# Altium PCB PCB1.PcbDoc
Units mil, origin at the board's own origin, x right, y up, seen from the top; angles counter-clockwise.
Board outline 10200 x 4275 mil, 2 copper layers (Top Layer, Bottom Layer); 50 components, 28 nets, 114 pads, 0 vias.
Unrouted connection lines stored in the file: 51.
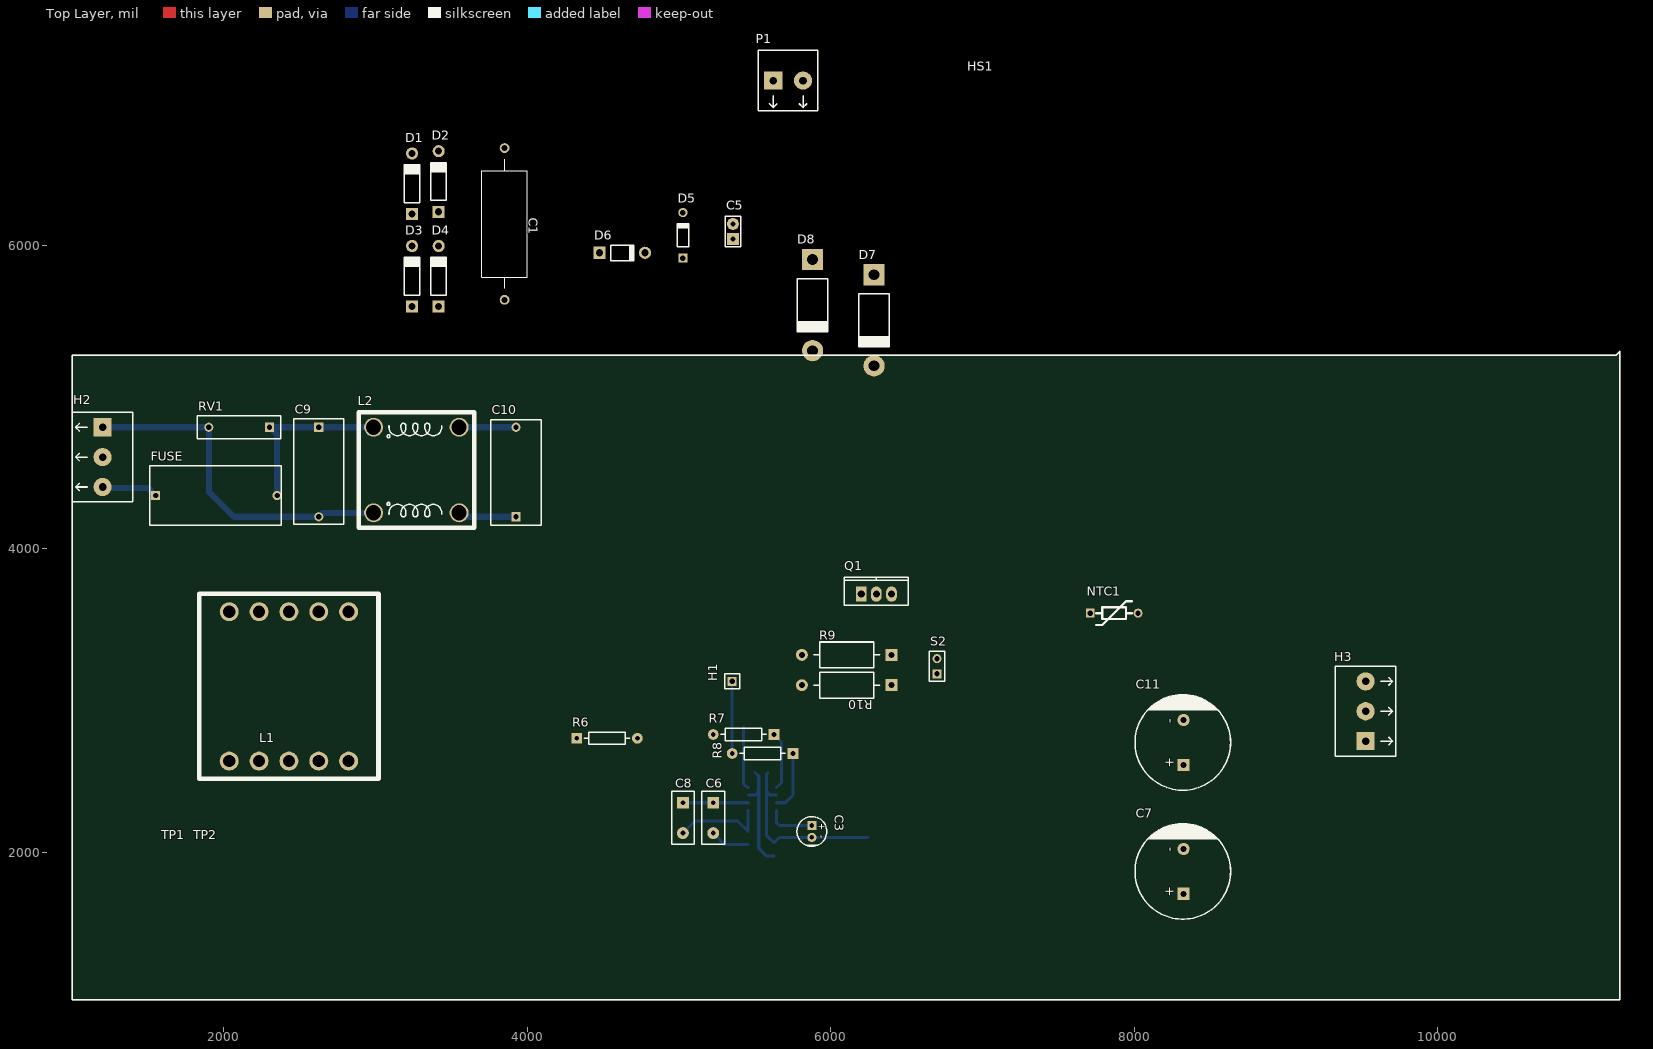
[diagram p0: Top Layer view]
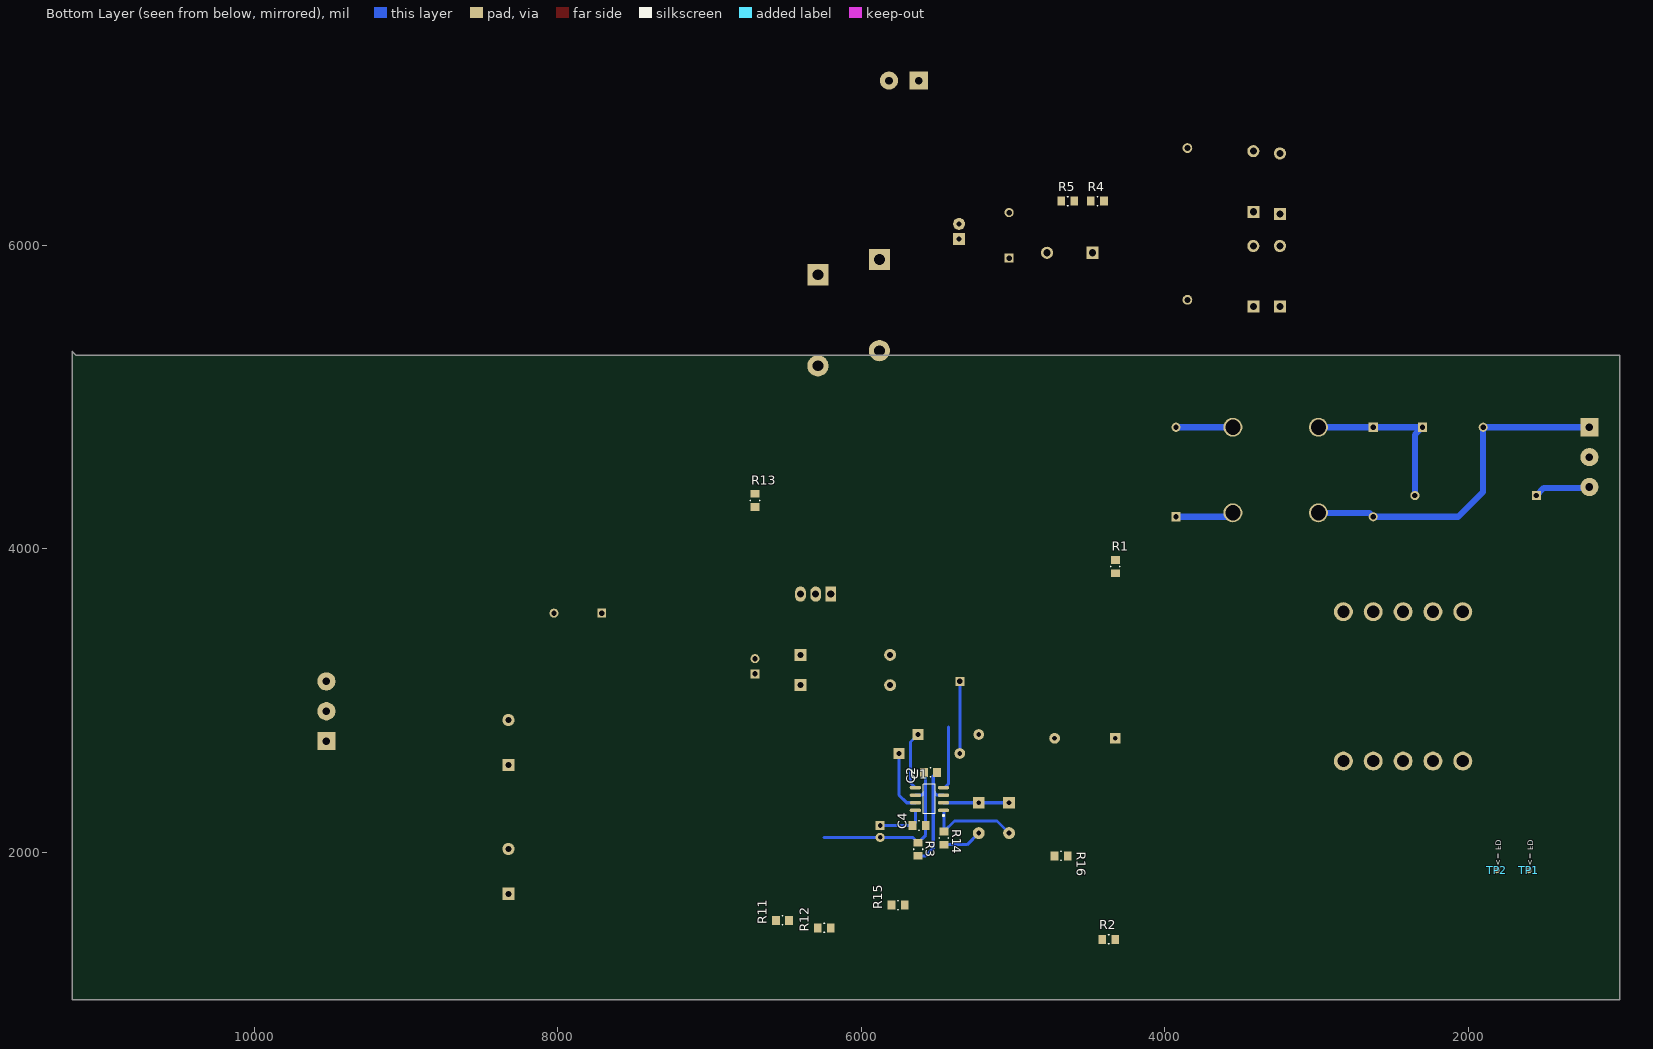
[diagram p1: Bottom Layer view, seen from below]

## Layer stack, top to bottom
Top Solder: solder mask 0.4, Solder Resist, Dk 3.5
Top Layer: signal copper 1.4
Dielectric 1: dielectric 12.6, FR-4, Dk 4.8
Bottom Layer: signal copper 1.4
Bottom Solder: solder mask 0.4, Solder Resist, Dk 3.5

## Board outline
1000,1025 11200,1025 11200,5300 11175,5275 1000,5275

## Design rules (kind name [scope] priority, off if disabled: settings)
Clearance [All] p1: gap=10 ignorepadtopadclearanceinfootprint=FALSE except(0: Arc-Hole Track-Hole SMDPad-Hole THPad-Hole Via-Hole Fill-Hole Poly-Hole Region-Hole Text-Hole)
Height [All] p1: minheight=0 maxheight=1574.8 prefheight=500
PolygonConnect [All] p1: connectstyle=Relief reliefconductorwidth=10 reliefentries=4 polygonreliefangle="90 Angle" airgapwidth=10
RoutingVias [All] p1: holewidth=28 width=50 viastyle="Through Hole" minholewidth=28 minwidth=50 maxholewidth=28 maxwidth=50
SolderMaskExpansion [All] p1: expansion=4
Width [All] p1: maxlimit=40 minlimit=20 preferedwidth=20
29 further rules are at their usual default settings.

## Components (designator, comment, footprint, x,y, rotation, side; value= is the part's Value field where it differs from the comment)
C1 "470n" AXIAL-1.0 3850,6140 r270 top
C2 "10n" 0805C 5500,2525 r0 bottom
C3 "22u" CP-5.0mm-11.0mm-2.0mm 5875,2175 r90 top
C4 "100n" 0805C 5661.61,2175 r180 bottom
C5 "12nF" C100-200-100 5355,6040 r90 top
C6 "680n" C200-350-150 5225,2325 r270 top
C7 "100u" CP-16.0mm-25.0mm-7.5mm 8325,1725 r270 top
C8 "330n" C200-350-150 5025,2325 r270 top
C9 "220nF" C590-695-330 2625,4800 r270 top
C10 "Value" C590-695-330 3925,4210 r90 top
C11 "100u" CP-16.0mm-25.0mm-7.5mm 8325,2575 r270 top
D1 "1N4007" DO-41-Plastic 3240,6205 r90 top
D2 "1N4007" DO-41-Plastic 3415,6220 r90 top
D3 "1N4007" DO-41-Plastic 3240,5595 r90 top
D4 "1N4007" DO-41-Plastic 3415,5595 r90 top
D5 "1N4150" DO-35-Glass 5025,5915 r90 top
D6 "1N4746A" DO-41-Glass 4475,5950 r0 top
D7 "1N5401" DO-201-Plastic 6285,5805 r270 top
D8 "1N5401" DO-201-Plastic 5880,5905 r270 top
FUSE "Value" Fuse 1550,4350 r0 top
H1 "Header_1x1" HDR1X1 5350,3125 r0 top
H2 "AC_in" TB03 1200,4800 r270 top
H3 "DC_out" TB03 9525,2731.3 r90 top
HS1 "HS-TO-220" HS-TO-220-183012 7350,5775 r90 top
L1 "Indutor" TRZ30.010.1 2821.85,2600 r180 top
L2 "Indutor" IndutorAcoplado 2986.02,4800 r0 top
NTC1 "Value" Thermistor-315mil 7710.04,3575 r0 top
P1 "DC_input" KRE_2 5620,7085 r0 top
Q1 "IRF840" TO-220/123 6200,3700 r0 top
R1 "1.5M" 0805R 4325,3925 r270 bottom
R2 "1.5M" 0805R 4325,1425 r0 bottom
R3 "22k" 0805R 5625,2061.61 r270 bottom
R4 "180k" 0805R 4486.61,6290 r180 bottom
R5 "180k" 0805R 4681.61,6290 r180 bottom
R6 "100" R400-2.0mm 4325,2750 r0 top
R7 "68k" R400-2.0mm 5625,2775 r180 top
R8 "10" R400-2.0mm 5750,2650 r180 top
R9 "0.33" R-AC01 6400,3300 r180 top
R10 "0.33" R-AC01 6400,3100 r180 top
R11 "750k" 0805R 6475,1550 r0 bottom
R12 "750k" 0805R 6200,1500 r0 bottom
R13 "9.53k" 0805R 6700,4275 r90 bottom
R14 "12k" 0805R 5455,2135 r270 bottom
R15 "750k" 0805R 5713.39,1650 r0 bottom
R16 "750k" 0805R 4725,1975 r180 bottom
RV1 "Res Varistor" C400-550-150 2300,4800 r180 top
S2 "Header_1x2" HDR-M-1x2-2.54mm-180-9.2mm 6700,3175 r90 top
TP1 "TestPoint" FD 1600,1880 r90 top
TP2 "TestPoint" FD 1810,1880 r90 top
U1 "IC" SO8_L 5550,2350 r0 bottom

## Footprints (in the part's own frame and the unit in brackets; to place one, negate y for a bottom-side part, rotate by r counter-clockwise, add the part's x,y. Pads: shape width x height; smd on the part's side, far side on the other; paste and mask are expansions set on the pad)
0805C [mm] "Chip Capacitor; Body 2 x 1.3 mm (LxW typ)"
  rect 1.3x1.5 smd: 1(0,0) 2(2.2,0)
  silkscreen extent 1.05,-0.76 1.15,0.76, body extent 0.1,-0.64 2.1,0.61, height 0.78
0805R [mm] "Chip Resistor; Body 2 x 1.3 mm (LxW typ)"
  rect 1.3x1.5 smd: 1(0,0) 2(2.2,0)
  silkscreen extent 1.05,-0.76 1.15,0.76, body extent 0.1,-0.64 2.1,0.62, height 0.78
AXIAL-1.0 [mm] "Axial Device, Thru-Hole; 2 Leads; 1.0 in Pin Spacing"
  round 1.65 hole 1: 1(-12.7,0) 2(12.7,0)
  silkscreen extent -10.79,-3.81 10.79,3.81
C100-200-100 [mm] "Radial Cap, Thru-Hole; 2 Leads; 0.1 in Pin Spacing"
  rect 2x2 hole 0.8: 1(0,0)
  round 2 hole 0.8: 2(2.54,0)
  silkscreen extent -1.27,-1.27 3.81,1.27, body extent -1.65,-0.89 4.19,0.81, height 6.22
C200-350-150 [mm] "Radial Cap, Thru-Hole; 2 Leads; 0.2 in Pin Spacing"
  rect 2x2 hole 0.8: 1(0,0)
  round 2 hole 0.8: 2(5.08,0)
  silkscreen extent -1.91,-1.91 6.98,1.91, body extent -1.01,-0.81 5.98,0.89, height 7.31
C400-550-150 [mil] "Radial Cap, Thru-Hole; 2 Leads; 0.4 in Pin Spacing"
  rect 60x60 hole 35: 1(0,0)
  round 60 hole 35: 2(400,0)
  silkscreen extent -75,-75 475,75
C590-695-330 [mil] "Radial Cap, Thru-Hole; 2 Leads; 0.4 in Pin Spacing"
  rect 60x60 hole 35.43: 1(0,0)
  round 60 hole 35.43: 2(590,0)
  silkscreen extent -55,-165 640,165
CP-5.0mm-11.0mm-2.0mm [mil] "Capacitor Electrolytic Radial - 5 x 11 mm - Pin Spacing 2.0 mm"
  rect 60x60 hole 30: 1(0,0)
  round 60 hole 30: 2(-78.74,0)
  silkscreen extent -138,-98 59,98, body extent -139,-101 59,98, height 454
CP-16.0mm-25.0mm-7.5mm [mil] "Capacitor Electrolytic Radial - 16 x 25 mm - Pin Spacing 7.5 mm"
  rect 80x80 hole 40: 1(0,0)
  round 80 hole 40: 2(-295.28,0)
  silkscreen extent -462,-320 167,310, body extent -472,-325 177,323, height 1028
DO-35-Glass [mil] "Diode, Axial; Body 3.8 x 1.9 mm (LxDia. max), Lead Dia. 0.53 mm (max), Lead Spacing 7.62 mm; 3D Wagner Bernardo"
  rect 60x60 hole 35.43: A(0,0)
  round 60 hole 35.43: K(300,0)
  silkscreen extent 75,-37 225,37, body extent -10,-38 310,38, height 77
DO-41-Glass [mil] "Diode, Axial; Body 4.1 x 2.6 mm (LxDia. max), Lead Dia. 0.86 mm (max), Lead Spacing 7.62 mm; 3D Julien THIEREN"
  rect 80x80 hole 47.24: A(0,0)
  round 80 hole 47.24: K(300,0)
  silkscreen extent 75,-51 225,51, body extent -14,-53 316,52, height 111
DO-41-Plastic [mil] "Diode, Axial; Body 4.1 x 2.6 mm (LxDia. max), Lead Dia. 1.14 mm (max), Lead Spacing 10.16 mm; 3D Wagner Bernardo"
  rect 80x80 hole 47.24: A(0,0)
  round 80 hole 47.24: K(400,0)
  silkscreen extent 75,-52 325,51, body extent -15,-55 419,51, height 112
DO-201-Plastic [mil] "Diode, Axial; Body 9.5 x 5.3 mm (LxDia. max), Lead Dia. 1.30 mm (max), Lead Spacing 15.24 mm; 3D Wagner Bernardo"
  rect 140x140 hole 70.87: A(0,0)
  round 140 hole 70.87: K(600,0)
  silkscreen extent 125,-100 475,100, body extent -25,-110 627,110, height 239
FD [mm]
  round 1 smd far side: 10(0,0)
Fuse [mil] "Radial Cap, Thru-Hole; 2 Leads; 0.4 in Pin Spacing"
  rect 60x60 hole 35.43: 1(0,0)
  round 60 hole 35.43: 2(800,0)
  silkscreen extent -39,-195 827,195
HDR1X1 [mm] "Connector; Header; 1 Position"
  rect 1.5x1.5 hole 0.9: 1(0,0)
  silkscreen extent -1.27,-1.27 1.27,1.27
HDR-M-1x2-2.54mm-180-9.2mm [mm] "Male Header, 1 line, 2 columns, 180 degrees, 9.2 mm length, 3D ASSMANN WSW components"
  rect 1.5x1.5 hole 0.9: 1(0,0)
  round 1.5 hole 0.9: 2(2.54,0)
  silkscreen extent -1.27,-1.27 3.81,1.27, body extent -1.17,-1.25 3.91,1.25, height 6.23
HS-TO-220-183012 [mil] "Heatsink TO220 183012"
  body extent 0,0 1331,457, height 984
IndutorAcoplado [mm] "Indutor acoplado - filtro EMI"
  round 3.175 hole 2.54: 1(0,0) 2(14.325,0) 3(0,-14.325) 4(14.325,-14.325)
  silkscreen extent -2.5,-16.82 16.82,2.5
KRE_2 [mil] "Terminal Block 2 pins"
  rect 120x120 hole 50: 1(0,0)
  round 120 hole 50: 2(196.85,0)
  silkscreen extent -98,-200 295,200, body extent -123,-190 294,216, height 559
R400-2.0mm [mm] "Axial Device, Thru-Hole; 2 Leads; 0.4 in Pin Spacing"
  rect 1.8x1.8 hole 0.8: 1(0,0)
  round 1.8 hole 0.8: 2(10.16,0)
  silkscreen extent 1.27,-1.02 8.89,1.02, body extent -0.3,-1.17 10.46,1.14, height 2.93
R-AC01 [mm] "Cemented Wirewound Resistor 1 W"
  rect 2x2 hole 1: 1(0,0)
  round 2 hole 1: 2(15,0)
  silkscreen extent 2,-2.15 13,2.15
SO8_L [mm] "SOIC, 8-Leads, Body 4.9x3.9mm, Pitch 1.27mm, IPC High Density"
  oval 1.9x0.6 smd: 1(-2.35,1.905) 2(-2.35,0.635) 3(-2.35,-0.635) 4(-2.35,-1.905) 5(2.35,-1.905) 6(2.35,-0.635) 7(2.35,0.635) 8(2.35,1.905)
  silkscreen extent -2.47,-2.5 1,2.88, body extent -2,-2.5 2,2.5, height 1.75
TB03 [mil] "Terminal Block 3 pins"
  rect 120x120 hole 50: 1(0,0)
  round 120 hole 50: 2(196.85,0) 3(393.7,0)
  silkscreen extent -100,-200 492,200, body extent -123,-190 491,216, height 559
Thermistor-315mil [mm] "Thermistor 315 mil"
  rect 1.5x1.5 hole 0.9: 1(0,0)
  round 1.5 hole 0.9: 2(8,0)
  silkscreen extent 1,-2 7,2
TO-220/123 [mil] "TO, Thru-Hole, Vertical, Heatsink Mounted; 3 In-Line Leads; Pitch 2.54 mm"
  rect 70x100 hole 47.24: 1(0,0)
  oval 70x100 hole 47.24: 2(100,0) 3(200,0)
  silkscreen extent -111,-73 311,112, body extent -121,-59 321,126, height 832
TRZ30.010.1 [mm] "Carretel de Trafo - TERZI"
  round 3.175 hole 2.032: 1(0,0) 2(5,0) 3(10,0) 4(15,0) 5(20,0) 6(0,-25) 7(5,-25) 8(10,-25) 9(15,-25) 10(20,-25)
  silkscreen extent -5,-28 25,3

## Part data
C1: library part Capacitor, "Capacitor", Voltage="400 V", LatestRevisionDate=17-Jul-2002, LatestRevisionNote="Re-released for DXP Platform.", PackageReference=RAD-0.3, Published=8-Jun-2000, Publisher="Altium Limited"
C2 C4 C9 C10: library part Capacitor, "Capacitor", Voltage="100 V", LatestRevisionDate=17-Jul-2002, LatestRevisionNote="Re-released for DXP Platform.", PackageReference=RAD-0.3, Published=8-Jun-2000, Publisher="Altium Limited"
C3: library part Capacitor-Electrolytic, "Electrolytic Capacitor", Voltage="25 V"
C5 C6 C8: library part Capacitor, "Capacitor", Voltage="25 V", LatestRevisionDate=17-Jul-2002, LatestRevisionNote="Re-released for DXP Platform.", PackageReference=RAD-0.3, Published=8-Jun-2000, Publisher="Altium Limited"
C7 C11: library part Capacitor-Electrolytic, "Electrolytic Capacitor", Voltage="250 V"
D1 D2 D3 D4: "General Purpose Rectifier", Forward Current (If)="1 A", Forward Voltage (Vf)="1.1 V", Non-Repetitive Peak Forward Surge Current (Ifsm)="30 A", Peak Repetitive Reverse Voltage (Vrrm)="1000 V", Reverse Current (Ir)="5 uA", Total Capacitance (Ct)="15 pF"
D5: library part 1N914A, "Small Signal Diode", Forward Current (If)="300 mA", Forward Voltage (Vf)="1 V", Non-Repetitive Peak Forward Surge Current (Ifsm)="1 A", Peak Repetitive Reverse Voltage (Vrrm)="100 V", Reverse Current (Ir)="25 nA", Total Capacitance (Ct)="4 pF", Max Recovery Time (trr)=4ns
D6: "Zener Diode", Forward Voltage (Vf)="1.2 V", Power Dissipation (Pd)="1.3 W", Zener Current (Iz)="50 mA", Zener Voltage (Vz)="18 V"
D7 D8: "3 Amp Rectifier", Forward Current (If)="3 A", Forward Voltage (Vf)="1 V", Non-Repetitive Peak Forward Surge Current (Ifsm)="200 A", Peak Repetitive Reverse Voltage (Vrrm)="100 V", Reverse Current (Ir)="10 uA", Total Capacitance (Ct)="50 pF"
FUSE: library part FUSE, "Negative Temperature Coefficient Thermistor"
H1: "Header 1 Line 1 Pin", LatestRevisionDate=17-Jul-2002, LatestRevisionNote="Re-released for DXP Platform.", Publisher="Altium Limited"
H2 H3: library part Terminal_1x3, "Bloco terminal 1x3"
HS1: "Heatsink TO-220"
L1 L2: "Indutor Acoplado - Filtro EMI"
NTC1: library part NTC, "Negative Temperature Coefficient Thermistor"
P1: library part KRE_2, "Terminal Block 1x2"
Q1: library part IRFZ46N, "HEXFET Power MOSFET", Drain Current (Id)="53 A", Drain Current Peak (Idp)="180 A", Gate-to-Source Voltage (Vgs)="20 V", Power Dissipation (Pd)="107 W", Static Drain-to-Source On-Resistance (Rdson)="16.5 mR", Fall Time (Tf)="57 ns", Rise Time (Rt)="76 ns", Turn-Off Delay (Tdoff)="52 ns", Turn-On Delay (tdon)="14 ns"
R1 R2 R3 R4 R5 R11 R12 R13 R14 R15 R16: library part Resistor, "Resistor", Power="1/8 W", Tolerance=5%, LatestRevisionDate=17-Jul-2002, LatestRevisionNote="Re-released for DXP Platform.", PackageReference=AXIAL-0.3, Published=8-Jun-2000, Publisher="Altium Limited"
R6 R7 R8: library part Resistor, "Resistor", Power="1/4 W", Tolerance=5%, LatestRevisionDate=17-Jul-2002, LatestRevisionNote="Re-released for DXP Platform.", PackageReference=AXIAL-0.3, Published=8-Jun-2000, Publisher="Altium Limited"
R9 R10: library part ResistorPower, "Power Resistor", Power="1 W", Tolerance=5%, LatestRevisionDate=17-Jul-2002, LatestRevisionNote="Re-released for DXP Platform.", PackageReference=AXIAL-0.3, Published=8-Jun-2000, Publisher="Altium Limited"
RV1: "Varistor (Voltage-Sensitive Resistor)", Code_IPC=RESC2012, LatestRevisionDate=29-May-2009, LatestRevisionNote="IPC-7351 Footprint Added.", PackageDescription="Chip Resistor 0805 Case Size", PackageReference=6-0805, PackageVersion=Mar-2003, Published=24-Mar-1999, Publisher="Altium Limited"
S2: "Header, 1 Line, 2 Columns, 2 Pins", LatestRevisionDate=17-Jul-2002, LatestRevisionNote="Re-released for DXP Platform.", Publisher="Altium Limited"
TP1 TP2: "Test Point"
U1: library part L6562, "PFC Controller"

## Nets (pads, with @x,y where several pads share a name; then routed paths per layer and width w, separated by ;. In a path a pad name is that pad's centre, name@x,y a point inside that pad or via, vN(x,y) a via of type N, cw(c..) or ccw(c..) an arc to the next point about the centre after c; other vN are vias at no path point)
GND: C1.2 C2.2 C3.2 C4.2 C11.2 D3.A D4.A D6.A H3.3 L1.4 P1.2 R3.1 R9.2 R10.2 R13.1 S2.1 U1.6 | length 1202.4
  Bottom Layer w20: C2.2 5575,2513.39 5575,2400 ; U1.6 5600,2375 5575,2400 ; 6246.26,2096.26 C3.2 5659.65,2096.26 R3.1 5575,2111.61 C4.2 5575,2400
NetC2_1: C2.1 R2.2 R3.2 U1.3 | length 708.9
  Bottom Layer w20: U1.3 5500,2375 5525,2400 ; C2.1 5525,2500 5525,2400 ; R3.2 5575,1975 5525,2025 5525,2400
NetC3_1: C3.1 C4.1 D5.K R5.2 U1.8 | length 321.3
  Bottom Layer w20: U1.8 5642.52,2194.09 C4.1 C3.1
NetC5_1: C5.1 D5.A D6.K
NetC5_2: C5.2 R6.1
NetC6_1: C6.1 C8.1 U1.2 | length 432.5
  Bottom Layer w20: C8.1 C6.1 U1.2
NetC6_2: C6.2 R14.2 | length 261.7
  Bottom Layer w20: C6.2 5301.61,2048.39 R14.2
NetC7_1: C7.1 H3.1 NTC1.2 R11.2
NetC7_2: C7.2 C11.1
NetC8_2: C8.2 R14.1 R15.1 R16.2 U1.1 | length 633.2
  Bottom Layer w20: C8.2 5105,2205 5385,2205 R14.1 5455,2272.52 U1.1
NetC9_1: C9.1 FUSE.2 L2.1 RV1.1 | length 1156.7
  Bottom Layer w40: FUSE.2 2350,4750 RV1.1 C9.1 L2.1
NetC9_2: C9.2 H2.1 L2.3 RV1.2 | length 2290.1
  Bottom Layer w40: H2.1 RV1.2 1900,4375 2065,4210 C9.2 2651.02,4236.02 L2.3
NetC10_1: C10.1 D2.A D4.K L2.4 | length 385.8
  Bottom Layer w40: L2.4 3576.02,4210 C10.1
NetC10_2: C10.2 D1.A D3.K L2.2 | length 375
  Bottom Layer w40: L2.2 C10.2
NetD7_A: D7.A L1.2 Q1.2
NetD7_K: D7.K D8.K NTC1.1
NetFUSE_1: FUSE.1 H2.3 | length 373.3
  Bottom Layer w40: H2.3 1206.3,4400 1500,4400 FUSE.1
NetH1_1: H1.1 Q1.1 R8.2 | length 475
  Bottom Layer w20: R8.2 H1.1
NetL1_3: L1.3 R6.2 R7.2
NetQ1_S: Q1.3 R9.1 R10.1 S2.2 U1.4 | length 417.8
  Bottom Layer w20: 5425,2825 5425,2450 5450,2425 U1.4
NetR1_2: R1.2 R2.1
NetR4_2: R4.2 R5.1
NetR7_1: R7.1 U1.5 | length 384.2
  Bottom Layer w20: R7.1 5675,2725 5675,2457.48 U1.5
NetR8_1: R8.1 U1.7 | length 403.2
  Bottom Layer w20: U1.7 5700,2325 5750,2375 R8.1
NetR11_1: R11.1 R12.2
NetR12_1: R12.1 R15.2
NetR13_2: R13.2 R16.1
VCC: C1.1 D1.K D2.K D8.A L1.1 P1.1 R1.1 R4.1
pads on no net: H2.2 H3.2 L1.5 L1.6 L1.7 L1.8 L1.9 L1.10 TP1.10 TP2.10

## Silkscreen, mask and mechanical layers (free items; w line width, h text height)
Top Overlay:
  the board outline again, w10

## Text inside footprints (layer, text, board x,y; h text height)
C3: Top Overlay "-" at 5920,2111.26 h40 r270; Top Overlay "+" at 5920,2190 h40 r270
C7: Top Overlay "+" at 8259,1705.32 h59.06 r90; Top Overlay "-" at 8259,2000.59 h59.06 r90
C11: Top Overlay "-" at 8259,2850.59 h59.06 r90; Top Overlay "+" at 8259,2555.32 h59.06 r90
TP1: Bottom Overlay "<= FD" at 1620,1910 h60 r90
TP2: Bottom Overlay "<= FD" at 1830,1910 h60 r90